# Altium PCB PCB1.PcbDoc
Units mil, origin at the board's own origin, x right, y up, seen from the top; angles counter-clockwise.
Board outline 2030 x 2370 mil, 2 copper layers (Top Layer, Bottom Layer); 14 components, 13 nets, 67 pads, 1 vias.
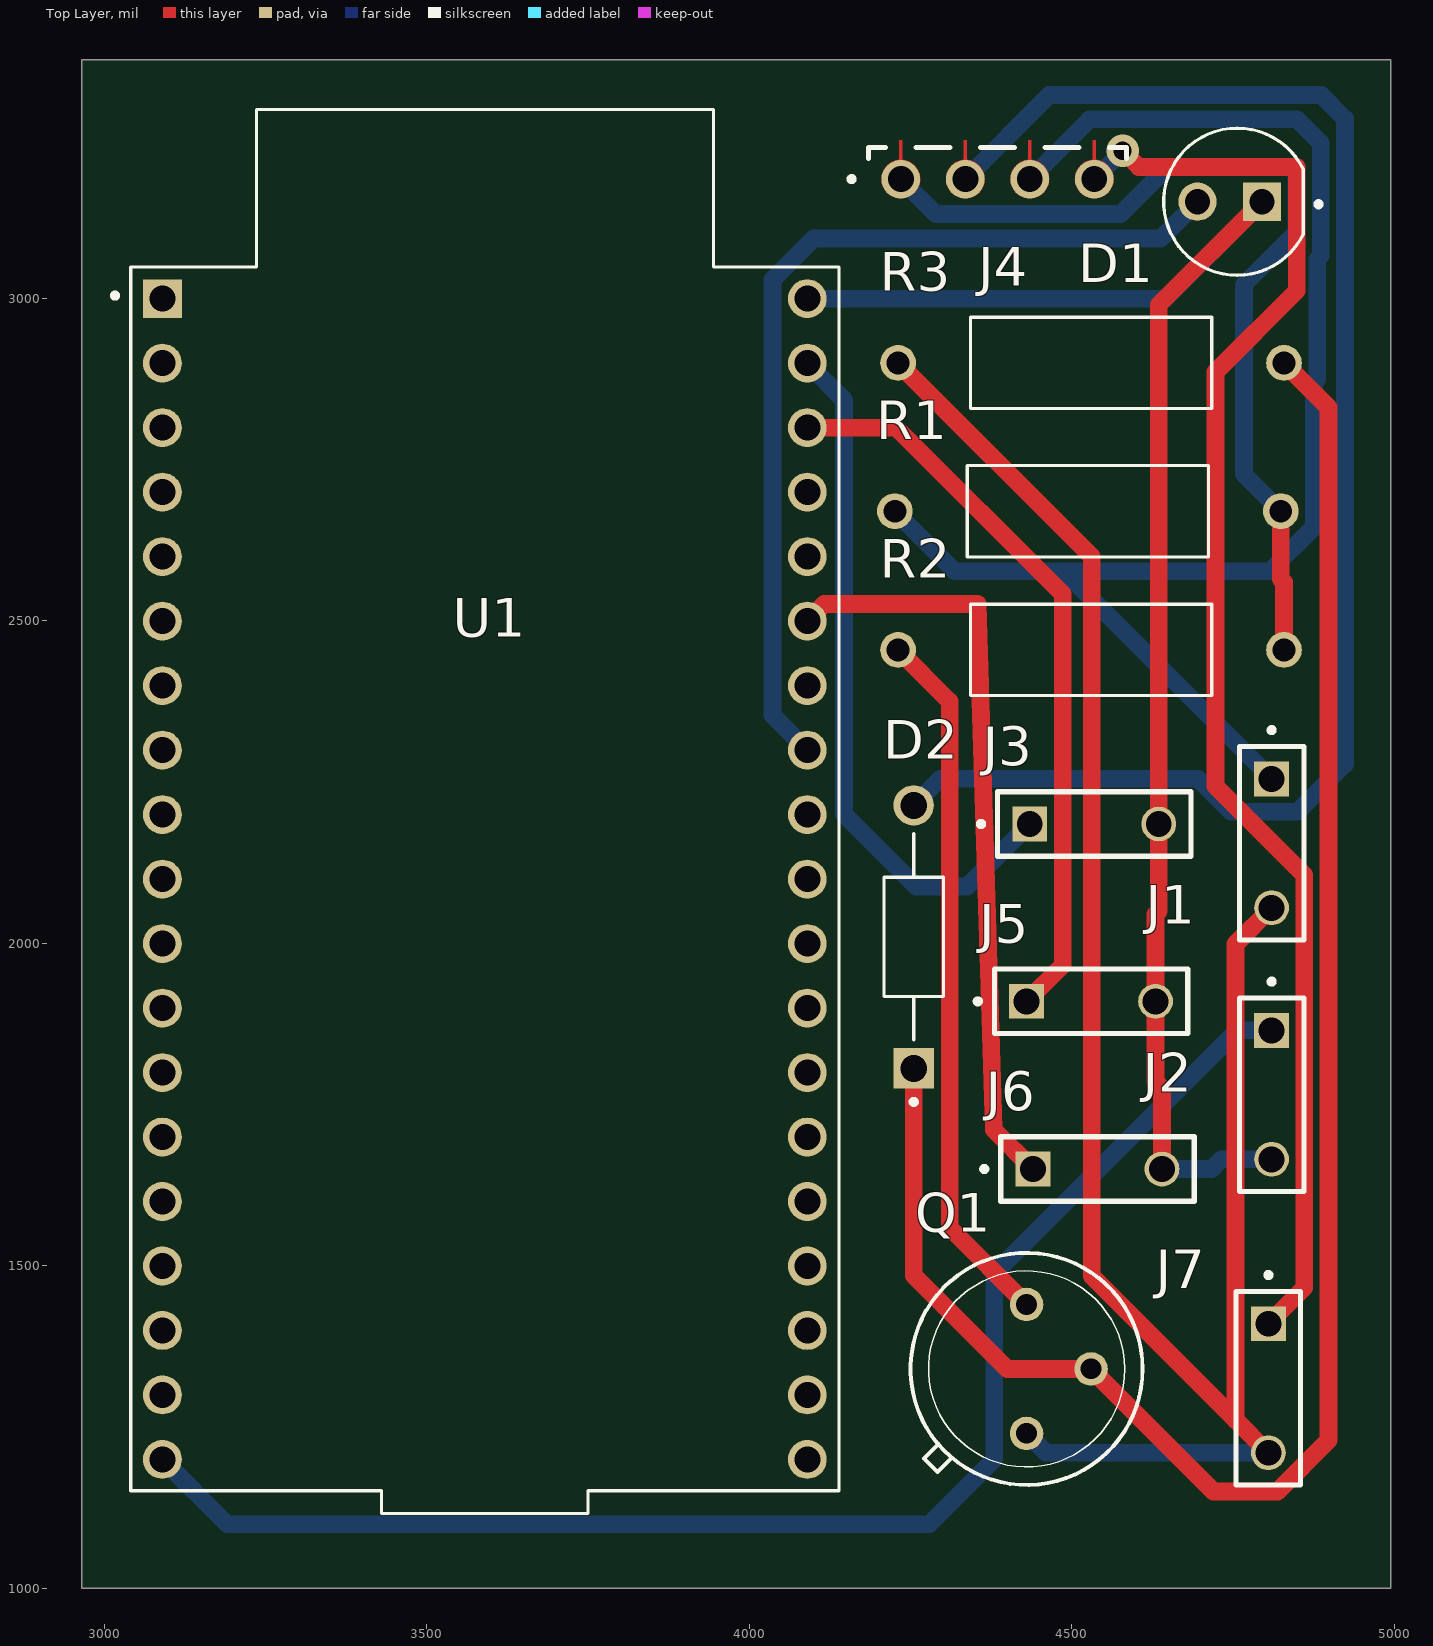
[diagram p0: Top Layer view]
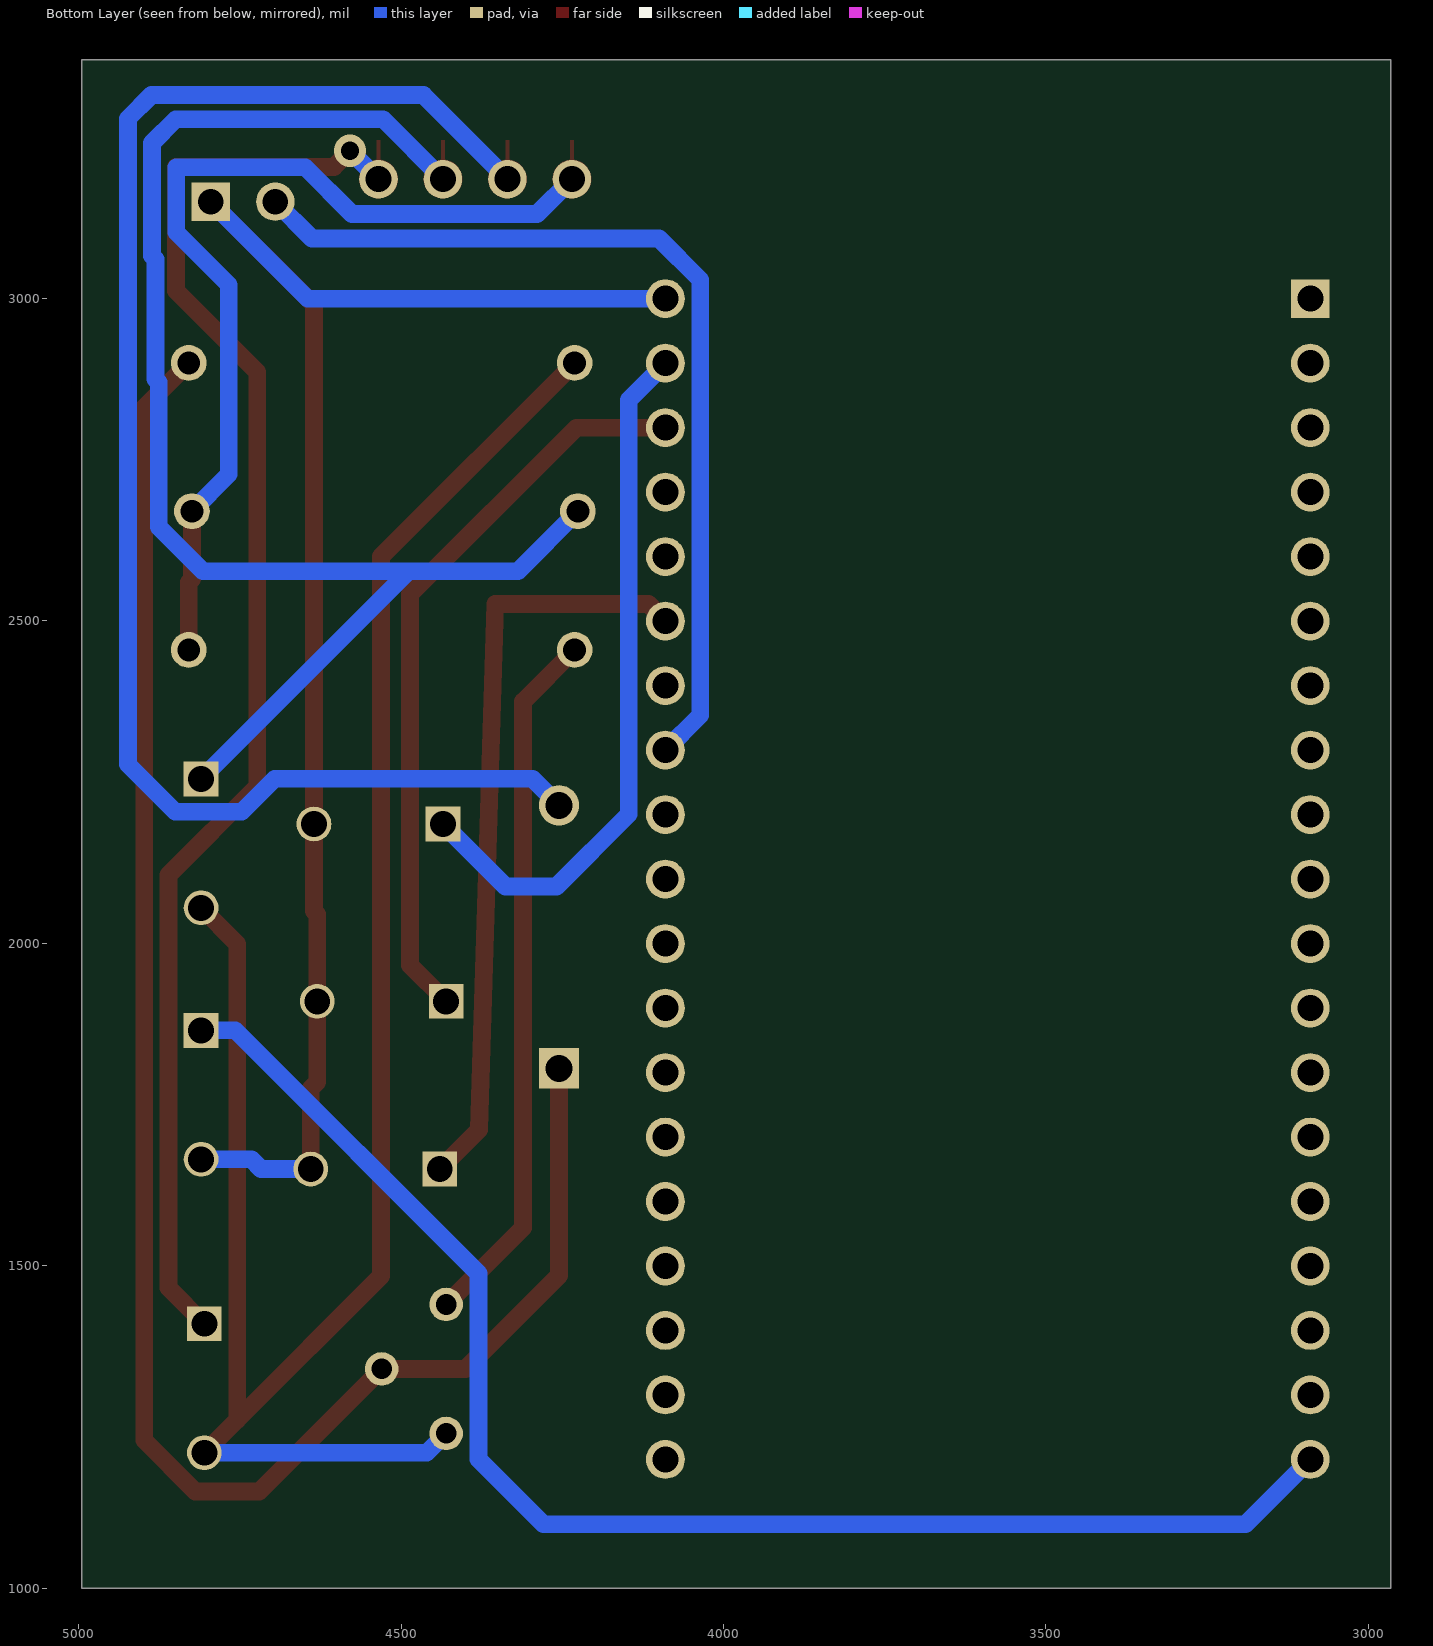
[diagram p1: Bottom Layer view, seen from below]
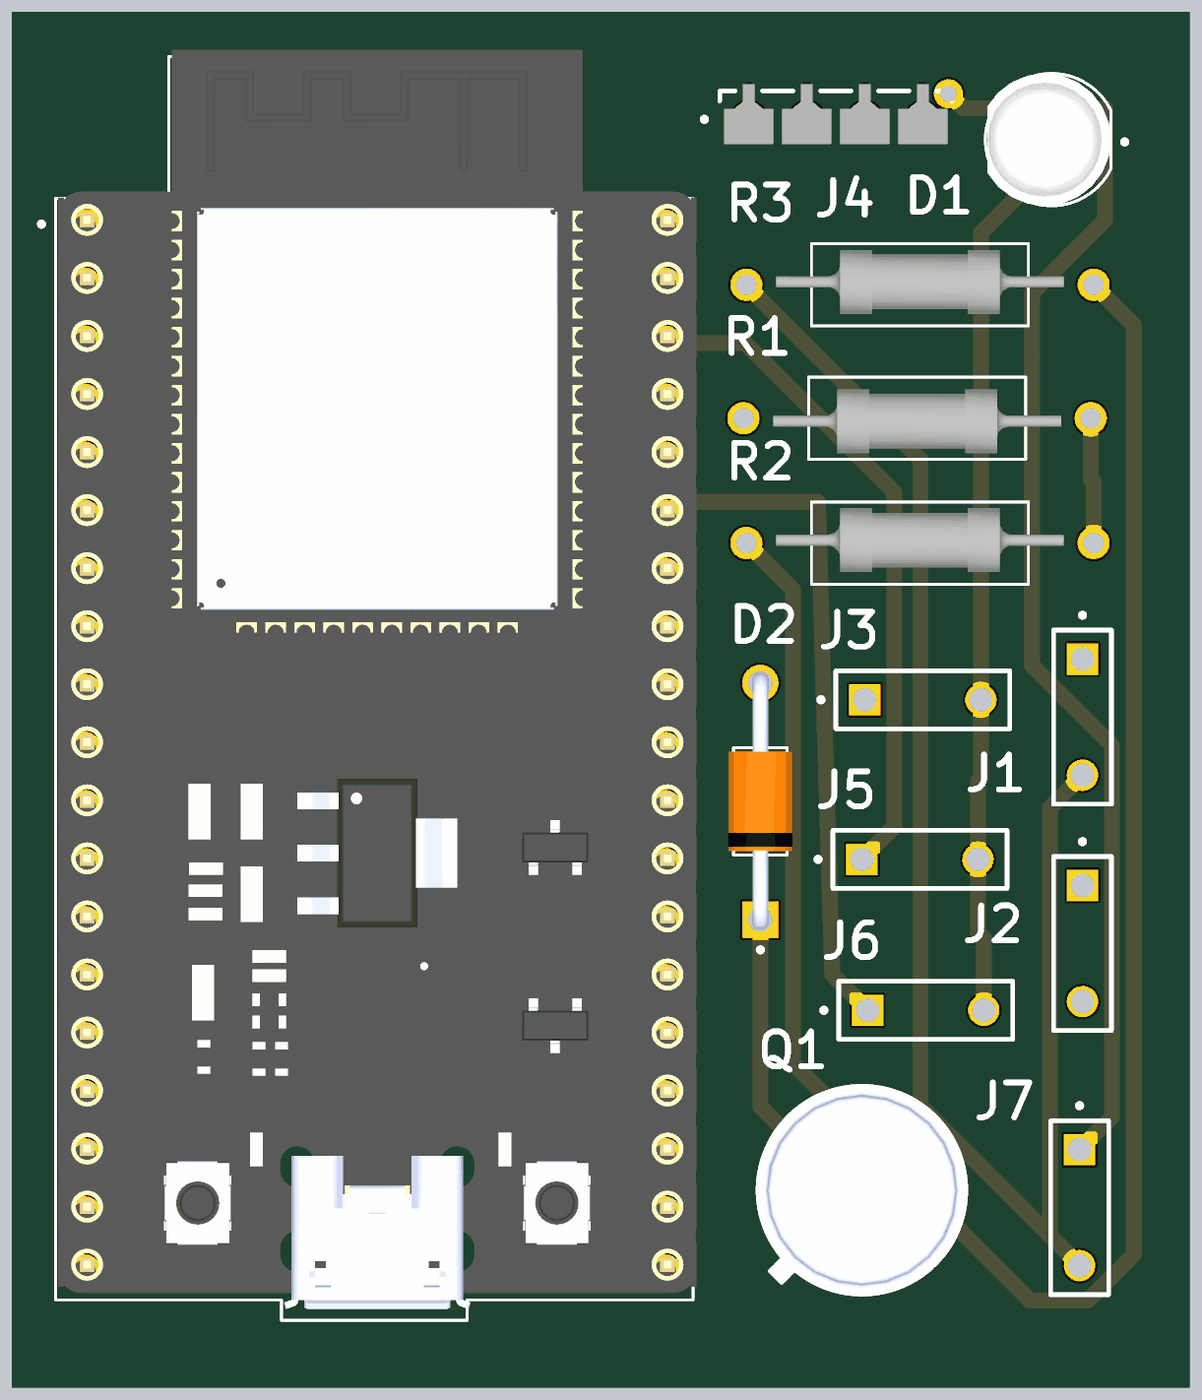
[diagram p2: 3D render of the assembled board from above, using the file's embedded part models]

## Layer stack, top to bottom
Top Solder: solder mask 0.4, Solder Resist, Dk 3.5
Top Layer: signal copper 1.4
Dielectric 1: dielectric 12.6, FR-4, Dk 4.8
Bottom Layer: signal copper 1.4
Bottom Solder: solder mask 0.4, Solder Resist, Dk 3.5

## Board outline
2965,1000 4995,1000 4995,3370 2965,3370

## Design rules (kind name [scope] priority, off if disabled: settings)
Clearance [All] p1: gap=10 ignorepadtopadclearanceinfootprint=FALSE except(0: Arc-Hole Track-Hole SMDPad-Hole THPad-Hole Via-Hole Fill-Hole Poly-Hole Region-Hole Text-Hole)
PolygonConnect [All] p1: connectstyle=Relief reliefconductorwidth=10 reliefentries=4 polygonreliefangle="90 Angle" airgapwidth=10
RoutingVias [All] p1: holewidth=28 width=50 viastyle="Through Hole" minholewidth=28 minwidth=50 maxholewidth=28 maxwidth=50
SolderMaskExpansion [All] p1: expansion=4 istentingtop=FALSE
Width [All] p1: maxlimit=39.37 minlimit=19.68 preferedwidth=27.56
30 further rules are at their usual default settings.

## Components (designator, comment, footprint, x,y, rotation, side; value= is the part's Value field where it differs from the comment)
D1 "151054RS03000" LED_151054RS03000 4745,3150 r180 top
D2 "1N4007G" DIOAD1036W78L470D235 4255,2010 r90 top
J1 "S4" ? 4810,2255 r270 top
J2 "S4" ? 4810,1865 r270 top
J3 "S1" ? 4435,2185 r0 top
J4 "RGB led" SAMTEC_MTLW-104-X-X-S-X 4385,3185 r180 top
J5 "S2" ? 4430,1910 r0 top
J6 "S3" ? 4440,1650 r0 top
J7 "S4" ? 4805,1410 r270 top
Q1 "BC547*" TO39 4430,1340 r0 top
R1 "1K" RESAD1520W70L1030D380 4525,2670 r0 top
R2 "220R" RESAD1520W70L1030D380 4530,2455 r180 top
R3 "1K" RESAD1520W70L1030D380 4530,2900 r180 top
U1 "ESP32" MODULE_DEVKIT_V1_ESP32-WROOM-32 3590,2100 r0 top

## Footprints (in the part's own frame and the unit in brackets; to place one, negate y for a bottom-side part, rotate by r counter-clockwise, add the part's x,y. Pads: shape width x height; smd on the part's side, far side on the other; paste and mask are expansions set on the pad)
DIOAD1036W78L470D235 [mm]
  round 1.59 hole 1.06: A(5.18,0)
  rect 1.59x1.59 / inner round 1.59 / far side rect 1.59x1.59 hole 1.06: C(-5.18,0)
  silkscreen extent -6.6,-1.18 4.07,1.18, body extent -5.65,-1.4 5.65,1.4, height 2.8
LED_151054RS03000 [mm]
  round 1.508 hole 1: A(1.27,0)
  rect 1.508x1.508 / inner round 1.508 / far side rect 1.508x1.508 hole 1: C(-1.27,0)
  silkscreen extent -3.6,-2.9 2.6,2.9, body extent -2.9,-2.9 2.51,2.9, height 12.1
MODULE_DEVKIT_V1_ESP32-WROOM-32 [mm]
  rect 1.53x1.53 / inner round 1.53 / far side rect 1.53x1.53 hole 1.02: 1(-12.7,22.85)
  round 1.53 hole 1.02: 2(-12.7,20.31) 3(-12.7,17.77) 4(-12.7,15.23) 5(-12.7,12.69) 6(-12.7,10.15) 7(-12.7,7.61) 8(-12.7,5.07) 9(-12.7,2.53) 10(-12.7,-0.01) 11(-12.7,-2.55) 12(-12.7,-5.09) 13(-12.7,-7.63) 14(-12.7,-10.17) 15(-12.7,-12.71) 16(-12.7,-15.25) 17(-12.7,-17.79) 18(-12.7,-20.33) 19(-12.7,-22.87) 20(12.7,-22.87) 21(12.7,-20.33) 22(12.7,-17.79) 23(12.7,-15.25) 24(12.7,-12.71) 25(12.7,-10.17) 26(12.7,-7.63) 27(12.7,-5.09) 28(12.7,-2.55) 29(12.7,-0.01) 30(12.7,2.53) 31(12.7,5.07) 32(12.7,7.61) 33(12.7,10.15) 34(12.7,12.69) 35(12.7,15.23) 36(12.7,17.77) 37(12.7,20.31) 38(12.7,22.85)
  silkscreen extent -14.67,-25 13.95,30.3, body extent -13.84,-24.5 14.1,30.6, height 4.16
RESAD1520W70L1030D380 [mm]
  round 1.408 hole 0.9: 1(-7.6,0) 2(7.6,0)
  silkscreen extent -4.75,-1.8 4.75,1.8, body extent -6.3,-1.53 6.3,1.27, height 2.92
SAMTEC_MTLW-104-X-X-S-X [mm]
  round 1.52 hole 1.02: 01(3.81,0) 02(1.27,0) 03(-1.27,0) 04(-3.81,0)
  Top Layer region: -3.731,0.756 -3.652,0.743 -3.575,0.723 -3.501,0.694 -3.43,0.658 -3.363,0.615 -3.301,0.565 -3.245,0.509 -3.195,0.447 -3.152,0.38 -3.116,0.309 -3.087,0.235 -3.067,0.158 -3.054,0.079 -3.05,0 -3.051,-0.038 -3.054,-0.076 -3.058,-0.113 -3.065,-0.151 -3.073,-0.187 -3.083,-0.224 -3.095,-0.259 -3.109,-0.294 -3.124,-0.329 -3.141,-0.363 -3.16,-0.395 -3.18,-0.427 -3.202,-0.458 -3.225,-0.487 -3.25,-0.516 -3.276,-0.543 -3.304,-0.569 -3.333,-0.593 -3.362,-0.616 -3.393,-0.638 -3.425,-0.658 -3.458,-0.676 -3.492,-0.692 -3.527,-0.707 -3.562,-0.721 -3.598,-0.732 -3.634,-0.742 -3.671,-0.75 -3.708,-0.756 -3.745,-0.76 -3.745,-1.53 -3.875,-1.53 -3.875,-0.76 -3.912,-0.756 -3.949,-0.75 -3.986,-0.742 -4.022,-0.732 -4.058,-0.721 -4.093,-0.707 -4.128,-0.692 -4.162,-0.676 -4.195,-0.658 -4.227,-0.638 -4.258,-0.616 -4.287,-0.593 -4.316,-0.569 -4.344,-0.543 -4.37,-0.516 -4.395,-0.487 -4.418,-0.458 -4.44,-0.427 -4.46,-0.395 -4.479,-0.363 -4.496,-0.329 -4.511,-0.294 -4.525,-0.259 -4.537,-0.224 -4.547,-0.187 -4.555,-0.151 -4.562,-0.113 -4.566,-0.076 -4.569,-0.038 -4.57,0 -4.566,0.079 -4.553,0.158 -4.533,0.235 -4.504,0.309 -4.468,0.38 -4.425,0.447 -4.375,0.509 -4.319,0.565 -4.257,0.615 -4.19,0.658 -4.119,0.694 -4.045,0.723 -3.968,0.743 -3.889,0.756 -3.81,0.76
  Top Layer region: -1.191,0.756 -1.112,0.743 -1.035,0.723 -0.961,0.694 -0.89,0.658 -0.823,0.615 -0.761,0.565 -0.705,0.509 -0.655,0.447 -0.612,0.38 -0.576,0.309 -0.547,0.235 -0.527,0.158 -0.514,0.079 -0.51,0 -0.511,-0.038 -0.514,-0.076 -0.518,-0.113 -0.525,-0.151 -0.533,-0.187 -0.543,-0.224 -0.555,-0.259 -0.569,-0.294 -0.584,-0.329 -0.601,-0.363 -0.62,-0.395 -0.64,-0.427 -0.662,-0.458 -0.685,-0.487 -0.71,-0.516 -0.736,-0.543 -0.764,-0.569 -0.793,-0.593 -0.822,-0.616 -0.853,-0.638 -0.885,-0.658 -0.918,-0.676 -0.952,-0.692 -0.987,-0.707 -1.022,-0.721 -1.058,-0.732 -1.094,-0.742 -1.131,-0.75 -1.168,-0.756 -1.205,-0.76 -1.205,-1.53 -1.335,-1.53 -1.335,-0.76 -1.372,-0.756 -1.409,-0.75 -1.446,-0.742 -1.482,-0.732 -1.518,-0.721 -1.553,-0.707 -1.588,-0.692 -1.622,-0.676 -1.655,-0.658 -1.687,-0.638 -1.718,-0.616 -1.747,-0.593 -1.776,-0.569 -1.804,-0.543 -1.83,-0.516 -1.855,-0.487 -1.878,-0.458 -1.9,-0.427 -1.92,-0.395 -1.939,-0.363 -1.956,-0.329 -1.971,-0.294 -1.985,-0.259 -1.997,-0.224 -2.007,-0.187 -2.015,-0.151 -2.022,-0.113 -2.026,-0.076 -2.029,-0.038 -2.03,0 -2.026,0.079 -2.013,0.158 -1.993,0.235 -1.964,0.309 -1.928,0.38 -1.885,0.447 -1.835,0.509 -1.779,0.565 -1.717,0.615 -1.65,0.658 -1.579,0.694 -1.505,0.723 -1.428,0.743 -1.349,0.756 -1.27,0.76
  Top Layer region: 1.349,0.756 1.428,0.743 1.505,0.723 1.579,0.694 1.65,0.658 1.717,0.615 1.779,0.565 1.835,0.509 1.885,0.447 1.928,0.38 1.964,0.309 1.993,0.235 2.013,0.158 2.026,0.079 2.03,0 2.029,-0.038 2.026,-0.076 2.022,-0.113 2.015,-0.151 2.007,-0.187 1.997,-0.224 1.985,-0.259 1.971,-0.294 1.956,-0.329 1.939,-0.363 1.92,-0.395 1.9,-0.427 1.878,-0.458 1.855,-0.487 1.83,-0.516 1.804,-0.543 1.776,-0.569 1.747,-0.593 1.718,-0.616 1.687,-0.638 1.655,-0.658 1.622,-0.676 1.588,-0.692 1.553,-0.707 1.518,-0.721 1.482,-0.732 1.446,-0.742 1.409,-0.75 1.372,-0.756 1.335,-0.76 1.335,-1.53 1.205,-1.53 1.205,-0.76 1.168,-0.756 1.131,-0.75 1.094,-0.742 1.058,-0.732 1.022,-0.721 0.987,-0.707 0.952,-0.692 0.918,-0.676 0.885,-0.658 0.853,-0.638 0.822,-0.616 0.793,-0.593 0.764,-0.569 0.736,-0.543 0.71,-0.516 0.685,-0.487 0.662,-0.458 0.64,-0.427 0.62,-0.395 0.601,-0.363 0.584,-0.329 0.569,-0.294 0.555,-0.259 0.543,-0.224 0.533,-0.187 0.525,-0.151 0.518,-0.113 0.514,-0.076 0.511,-0.038 0.51,0 0.514,0.079 0.527,0.158 0.547,0.235 0.576,0.309 0.612,0.38 0.655,0.447 0.705,0.509 0.761,0.565 0.823,0.615 0.89,0.658 0.961,0.694 1.035,0.723 1.112,0.743 1.191,0.756 1.27,0.76
  Top Layer region: 3.889,0.756 3.968,0.743 4.045,0.723 4.119,0.694 4.19,0.658 4.257,0.615 4.319,0.565 4.375,0.509 4.425,0.447 4.468,0.38 4.504,0.309 4.533,0.235 4.553,0.158 4.566,0.079 4.57,0 4.569,-0.038 4.566,-0.076 4.562,-0.113 4.555,-0.151 4.547,-0.187 4.537,-0.224 4.525,-0.259 4.511,-0.294 4.496,-0.329 4.479,-0.363 4.46,-0.395 4.44,-0.427 4.418,-0.458 4.395,-0.487 4.37,-0.516 4.344,-0.543 4.316,-0.569 4.287,-0.593 4.258,-0.616 4.227,-0.638 4.195,-0.658 4.162,-0.676 4.128,-0.692 4.093,-0.707 4.058,-0.721 4.022,-0.732 3.986,-0.742 3.949,-0.75 3.912,-0.756 3.875,-0.76 3.875,-1.53 3.745,-1.53 3.745,-0.76 3.708,-0.756 3.671,-0.75 3.634,-0.742 3.598,-0.732 3.562,-0.721 3.527,-0.707 3.492,-0.692 3.458,-0.676 3.425,-0.658 3.393,-0.638 3.362,-0.616 3.333,-0.593 3.304,-0.569 3.276,-0.543 3.25,-0.516 3.225,-0.487 3.202,-0.458 3.18,-0.427 3.16,-0.395 3.141,-0.363 3.124,-0.329 3.109,-0.294 3.095,-0.259 3.083,-0.224 3.073,-0.187 3.065,-0.151 3.058,-0.113 3.054,-0.076 3.051,-0.038 3.05,0 3.054,0.079 3.067,0.158 3.087,0.235 3.116,0.309 3.152,0.38 3.195,0.447 3.245,0.509 3.301,0.565 3.363,0.615 3.43,0.658 3.501,0.694 3.575,0.723 3.652,0.743 3.731,0.756 3.81,0.76
  silkscreen extent -5.08,-1.25 5.85,0.1
TO39 [mil]
  round 52 hole 32: 1(0,-100) 2(100,0) 3(0,100)
  silkscreen extent -180,-180 180,180, body extent -180,-180 180,180, height 260
? [mm]
  rect 1.37x1.37 hole 1.02: 01(0,0)
  round 1.37 hole 1.02: 02(5.08,0)
  silkscreen extent -2.02,-1.27 6.35,1.27

## Part data
D1: "Red 623nm LED Indication - Discrete 1.9V Radial", Package="Radial Wurth Elektronik", Availability="In Stock", Check_prices=https://www.snapeda.com/parts/151054RS03000/Wurth+Elektronik/view-part/?ref=eda, MF="Wurth Elektronik", MP=151054RS03000, Price=None, Purchase-URL=https://pricing.snapeda.com/search/part/151054RS03000/?ref=eda, SnapEDA_Link=https://www.snapeda.com/parts/151054RS03000/Wurth+Elektronik/view-part/?ref=snap
D2: "1A, 1000V, Standard Recovery Rectifier", Package="DO-41 Taiwan Semiconductor", Availability="In Stock", Check_prices=https://www.snapeda.com/parts/1N4007G/Taiwan+Semiconductor/view-part/?ref=eda, MF="Taiwan Semiconductor", MP=1N4007G, Price=None, Purchase-URL=https://pricing.snapeda.com/search/part/1N4007G/?ref=eda, SnapEDA_Link=https://www.snapeda.com/parts/1N4007G/Taiwan+Semiconductor/view-part/?ref=snap
J1 J2 J3 J5 J6 J7: library part TSW-202-07-T-S, Package=None, Availability=Unavailable, MP=TSW-202-07-T-S, Price=None
J4: library part MTLW-104-X-X-S-X, Package=None, Availability=Unavailable, MF="{'manufacturer': u'Samtec Inc.'}", MP=MTLW-104-X-X-S-X, Price=None
Q1: "Trans GP BJT NPN 45V 0.1A 500mW 3-Pin TO-92 T/R", Package=None, Check_prices=https://www.snapeda.com/parts/BC547/Onsemi/view-part/?ref=eda, MF="ON Semiconductor", MP=BC547, SnapEDA_Link=https://www.snapeda.com/parts/BC547/Onsemi/view-part/?ref=snap
R1 R2 R3: library part CBT50J5R1, "5.1 Ohms Â±5% 0.5W, 1/2W Through Hole Resistor Axial Pulse Withstanding Carbon Composition", Package="Axial TE Connectivity / AMP", Availability="In Stock", Check_prices=https://www.snapeda.com/parts/CBT50J5R1/TE+Connectivity+%252F+AMP/view-part/?ref=eda, MF="TE Connectivity / AMP", MP=CBT50J5R1, Price=None, Purchase-URL=https://pricing.snapeda.com/search/part/CBT50J5R1/?ref=eda, SnapEDA_Link=https://www.snapeda.com/parts/CBT50J5R1/TE+Connectivity+%252F+AMP/view-part/?ref=snap
U1: library part DEVKIT_V1_ESP32-WROOM-32, "WROOM-32 Development Board ESP32 ESP-32S WiFi Bluetooth Dev Module", Package=Package, Check_prices=https://www.snapeda.com/parts/DEVKIT%20V1%20ESP32-WROOM-32/Espressif+Systems/view-part/?ref=eda, MF="Espressif Systems", MP="DEVKIT V1 ESP32-WROOM-32", SnapEDA_Link=https://www.snapeda.com/parts/DEVKIT%20V1%20ESP32-WROOM-32/Espressif+Systems/view-part/?ref=snap

## Via types
v1: diameter 50, hole 28, Top Layer to Bottom Layer, 1 vias

## Nets (pads, with @x,y where several pads share a name; then routed paths per layer and width w, separated by ;. In a path a pad name is that pad's centre, name@x,y a point inside that pad or via, vN(x,y) a via of type N, cw(c..) or ccw(c..) an arc to the next point about the centre after c; other vN are vias at no path point)
GND1: D1.C J2.02 J3.02 J5.02 J6.02 U1.38 | length 2516
  Top Layer w27.56: J6.02 4640,1775 4630,1785 J5.02 4630,2045 4635,2050 J3.02 4635,2990 D1.C
  Bottom Layer w27.56: U1.38 4644.61,2999.61 D1.C ; J6.02 4717,1650 4732,1665 J2.02
GND2: J1.02 J7.02 Q1.1 R3.2 | length 3132.5
  Top Layer w27.56: R3.2 4531,2599.79 4531,1484 4754,1261 ; J7.02 4754,1261 ; J1.02 4754,1999 4754,1261
  Bottom Layer w27.56: Q1.1 4460,1210 J7.02
NetD1_A: D1.A U1.31 | length 1460.9
  Bottom Layer w27.56: U1.31 4036,2353.61 4036,3029 4100,3093 4638,3093 D1.A
NetD2_A: D2.A J4.02 | length 2396
  Bottom Layer w27.56: D2.A 4296.06,2255 4696,2255 4747,2204 4850,2204 4923.59,2277.59 4923.59,3278.59 4886.83,3315.34 4465.34,3315.34 J4.02
NetD2_C: D2.C Q1.2 R3.1 | length 2835.3
  Top Layer w27.56: D2.C 4255,1485 4400,1340 Q1.2 4720,1150 4819,1150 4898.31,1229.31 4898.31,2830.9 R3.1
NetJ3_01: J3.01 U1.37 | length 1097.8
  Bottom Layer w27.56: U1.37 4147,2842.61 4147,2200 4259,2088 4338,2088 J3.01
NetJ4_01: J4.01 R1.2 R2.1 | length 1473.8
  Top Layer w27.56: R1.2 4824.21,2565 4829.21,2560 R2.1
  Bottom Layer w27.56: J4.01 4289,3131 4576,3131 4648.47,3203.47 4848.47,3203.47 4848.47,3102.47 4767,3021 4767,2727.21 R1.2
NetJ4_04: J4.04 J7.01 | length 2268.9
  Top Layer w27.56: v1(4579,3229) 4604,3204 4849,3204 4849,3012 4723,2886 4723,2243.75 4860.75,2106 4860.75,1465.75 J7.01
  Bottom Layer w27.56: J4.04 v1(4579,3229)
NetJ5_01: J5.01 U1.36 | length 1157.7
  Top Layer w27.56: U1.36 4228,2799.61 4486,2541.61 4486,1966 J5.01
NetJ6_01: J6.01 U1.33 | length 1176.6
  Top Layer w27.56: U1.33 4116.39,2526 4354,2526 4379,1711 J6.01
NetQ1_3: Q1.3 R2.2 | length 1097.5
  Top Layer w27.56: R2.2 4311,2374.79 4311,1559 Q1.3
VCC1: J2.01 U1.19 | length 2247.7
  Bottom Layer w27.56: U1.19 3190.61,1099 4279,1099 4380,1200 4380,1488 4757,1865 J2.01
VCC2: J1.01 J4.03 R1.1 | length 2276.6
  Bottom Layer w27.56: R1.1 4318.79,2577 4488,2577 ; J4.03 4527.78,3277.78 4849.27,3277.78 4886.03,3241.03 4886.03,3066.03 4880.71,3060.71 4880.71,2875 4875.71,2870 4875.71,2645.71 4807,2577 4488,2577 ; J1.01 4488,2577
pads on no net: U1.1 U1.2 U1.3 U1.4 U1.5 U1.6 U1.7 U1.8 U1.9 U1.10 U1.11 U1.12 U1.13 U1.14 U1.15 U1.16 U1.17 U1.18 U1.20 U1.21 U1.22 U1.23 U1.24 U1.25 U1.26 U1.27 U1.28 U1.29 U1.30 U1.32 U1.34 U1.35